# EAGLE board BlueDaq_V1.0 (EAGLE 7.6.0)
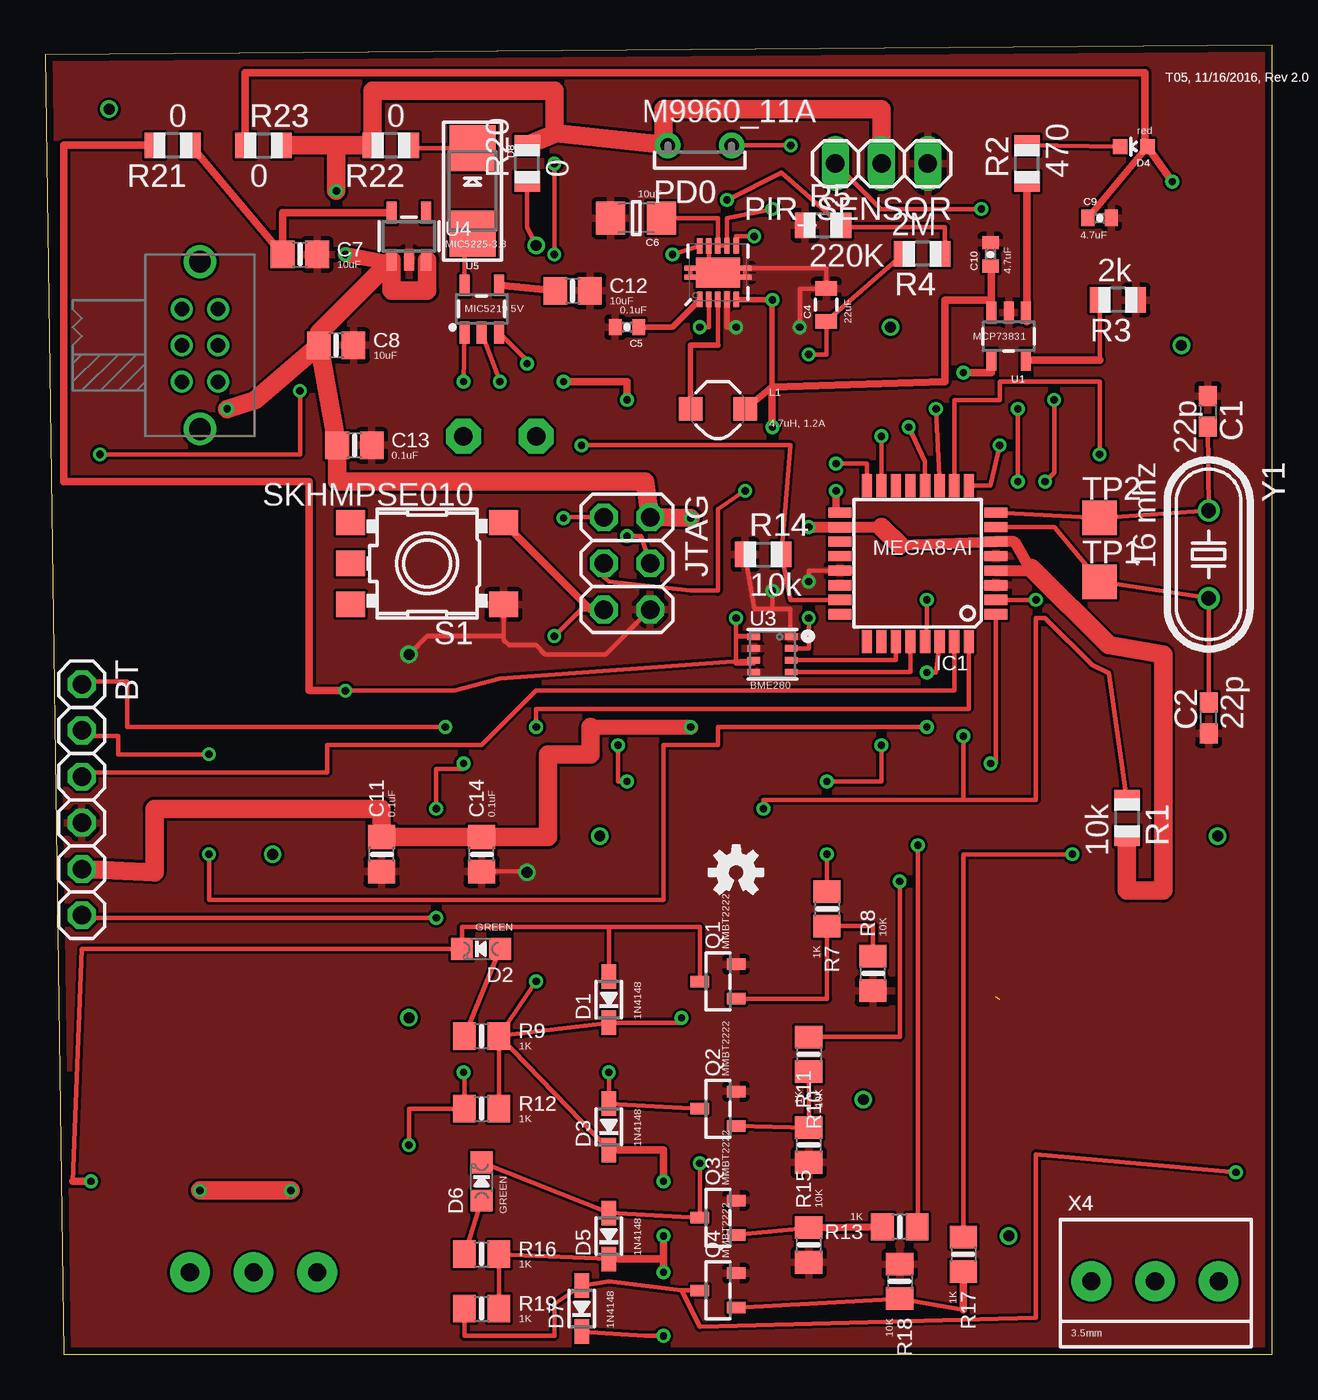
[diagram p0: board, top side]
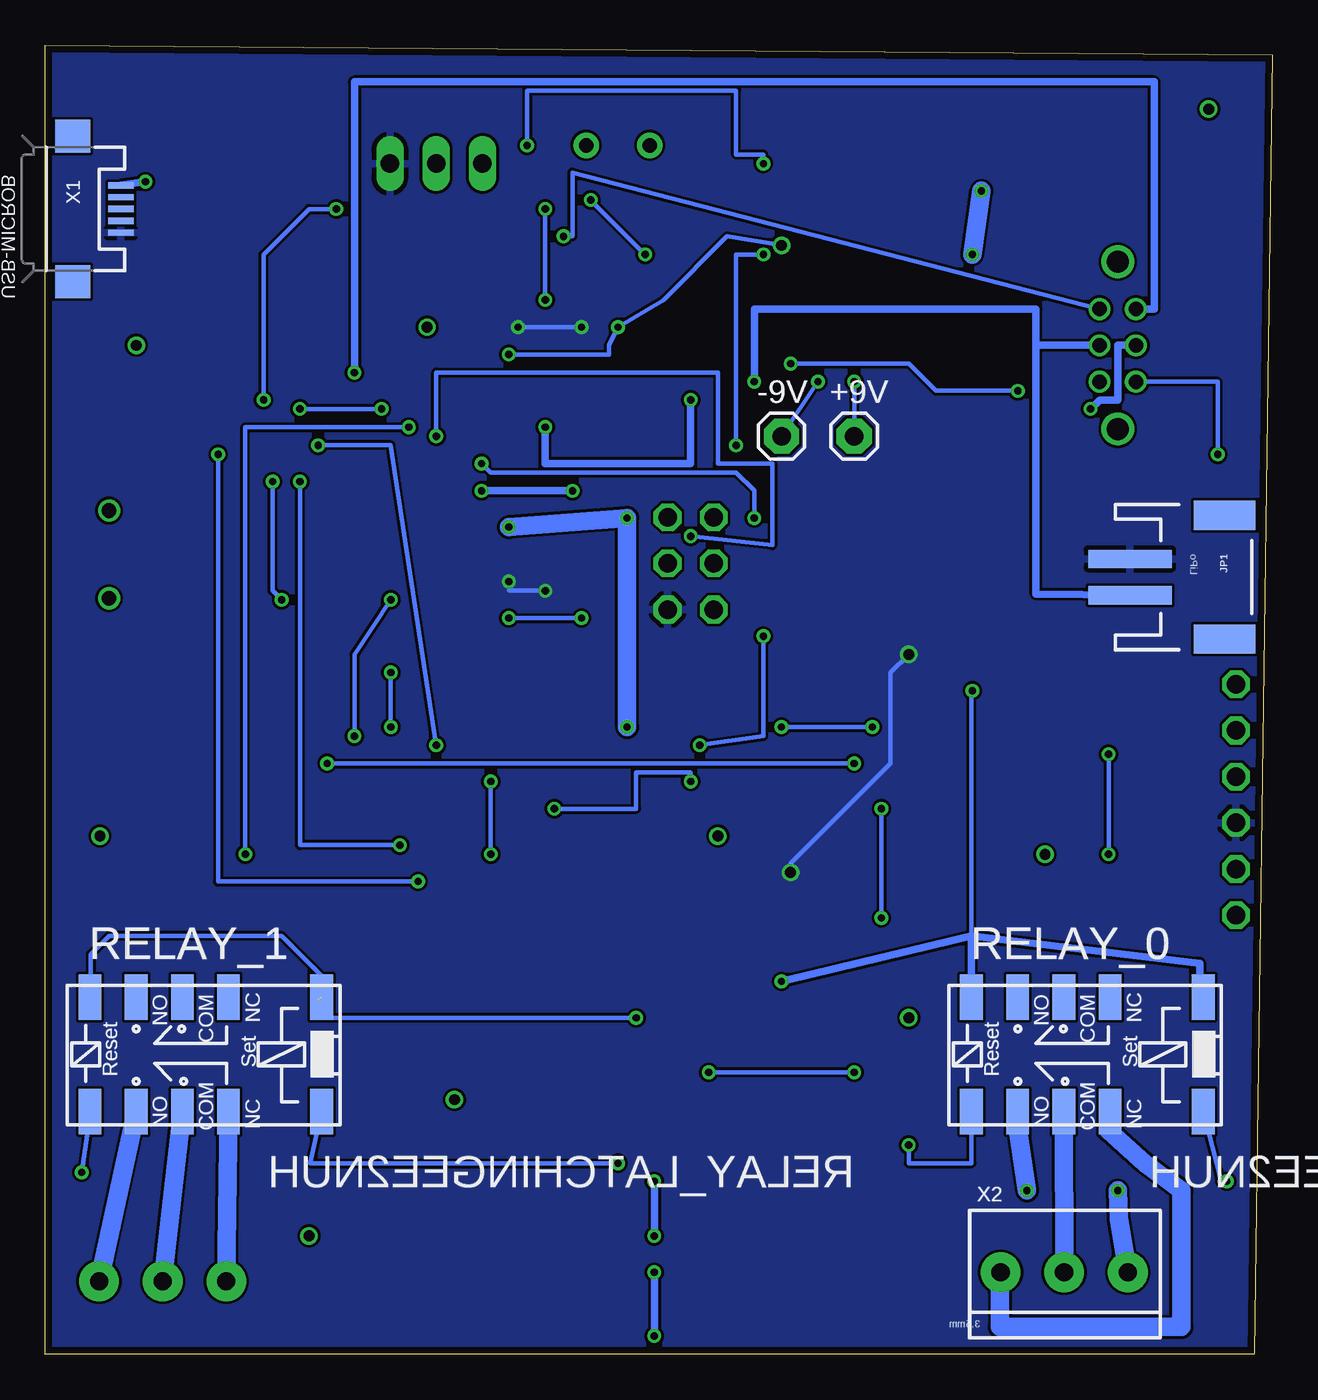
[diagram p1: board, bottom side, seen from below]

Size 67.5 x 72 mm. Coordinates in mm from the lower left corner, seen from the top.
Outline: 1,0 67.5,0 67.5,72 0,71.5 1,0
Copper layers (1*16): Top 0.0356mm / dielectric 1.5011mm / Bottom 0.0356mm
Design rules "OSH-Park-2-layer": minimum track width 6mil, minimum drill 13mil, track to track 6mil, track to pad 6mil, pad to pad 6mil, via to via 6mil, smd to smd 6mil, copper to edge 15mil, drill to drill 6mil, minimum pad ring 7mil, minimum via ring 7mil, stop-mask expansion 3mil, vias tented up to drill 0mil, thermal gap 10mil
Net classes: 1 HV: width 0.406 mm, drill 0.381 mm, clearance 1.016 mm

## Footprints (pad centres in the part's own frame; a part is rotated, then mirrored left to right if it is on the bottom)
1X01 = drill 1.016 pad 1.93 octagon: 1 0,0
1X06 = drill 1.016 octagon: 1 -6.35,0; 2 -3.81,0; 3 -1.27,0; 4 1.27,0; 5 3.81,0; 6 6.35,0
C0603 = smd 1.1 x 1: 1 -0.85,0; 2 0.85,0
0805 = smd 0.8 x 1.2: 1 -0.9,0; 2 0.9,0
0402-CAP = smd 0.7 x 0.9: 1 -0.65,0; 2 0.65,0
1206 = smd 1.6 x 1.8: 1 -1.4,0; 2 1.4,0
0805-NO@1 = smd 1.3 x 1.5: 1 -0.95,0; 2 0.95,0
SOD-323 = smd 1.35 x 0.8: A 1.27,0; C -1.27,0
CHIPLED_0805_NOOUTLINE = smd 1.2 x 1.2: A 0,-1.05; C 0,1.05
LED-0603 = smd 0.8 x 0.8: A 0,-0.75; C 0,0.75
SMADIODE = smd 2.54 x 2.54: A 2.349,0; C -2.349,0
TQFP32-08 = smd 1.27 x 0.559: 1 -4.293,2.8; 2 -4.293,2; 3 -4.293,1.2; 4 -4.293,0.4; 5 -4.293,-0.4; 6 -4.293,-1.2; 7 -4.293,-2; 8 -4.293,-2.8; 17 4.293,-2.8; 18 4.293,-2; 19 4.293,-1.2; 20 4.293,-0.4; 21 4.293,0.4; 22 4.293,1.2; 23 4.293,2; 24 4.293,2.8 | smd 0.559 x 1.27: 9 -2.8,-4.293; 10 -2,-4.293; 11 -1.2,-4.293; 12 -0.4,-4.293; 13 0.4,-4.293; 14 1.2,-4.293; 15 2,-4.293; 16 2.8,-4.293; 25 2.8,4.293; 26 2,4.293; 27 1.2,4.293; 28 0.4,4.293; 29 -0.4,4.293; 30 -1.2,4.293; 31 -2,4.293; 32 -2.8,4.293
JST-2-SMD = smd 1 x 4.6: 1 -1,-3.7; 2 1,-3.7 | smd 1.6 x 3.4: NC1 -3.4,1.5; NC2 3.4,1.5
2X03 = drill 1.016 octagon: 1 -2.54,-1.27; 2 -2.54,1.27; 3 0,-1.27; 4 0,1.27; 5 2.54,-1.27; 6 2.54,1.27
CDRH2D09 = smd 1.3 x 1.3: P$1 -1.5,0; P$2 1.5,0
M9960 = drill 0.8 pad 1.4: 1 -1.75,0; 2 1.75,0
1X03 = drill 1.016 long: 1 -2.54,0; 2 0,0; 3 2.54,0
SOT23-R = smd 0.635 x 1.016: 1 -0.95,-1; 2 0.95,-1; 3 0,1
R0805 = smd 1.1 x 1.4: 1 -1,0; 2 1,0
0805-NO = smd 1.24 x 1.5: 1 -0.95,0; 2 0.95,0
RELAY_EE2_LATCH = smd 1.25 x 2.5: 1 -6.2,-3.15; 3 -1.07,-3.15; 4 1.47,-3.15; 5 4.01,-3.15; 6 6.55,-3.15; 7 6.55,3.15; 8 4.01,3.15; 9 1.47,3.15; 10 -1.07,3.15; 12 -6.2,3.15
SKHMPXE010 = smd 1.6 x 1.4: 1 -4.2,2.25; 2 4.2,2.25; 3 -4.2,-2.25; 4 4.2,-2.25; 5 4.2,0
EG2211 = drill 0.8: P1 -1,0; P1-TA -1,2; P1-TB -1,-2; P2 1,0; P2-TA 1,2; P2-TB 1,-2 | drill 1.2: P$7 0,4.6; P$8 0,-4.6
TP19SQ = smd 1.9 x 1.9: TP 0,0
SOT23-5 = smd 0.55 x 1.2: 1 -0.95,-1.3; 2 0,-1.3; 3 0.95,-1.3; 4 0.95,1.3; 5 -0.95,1.3
QFN-10_PAD = smd 0.297 x 0.85: 1 -1,-1.475; 2 -0.5,-1.475; 3 0,-1.475; 4 0.5,-1.475; 5 1,-1.475; 6 1,1.475; 7 0.5,1.475; 8 0,1.475; 9 -0.5,1.475; 10 -1,1.475 | smd 0.7 x 0.28: 11 -1.5,0.25; 12 -1.5,-0.25; 13 1.5,0.25; 14 1.5,-0.25 | smd 2.4 x 1.65: 15 0,0
BME280 = smd 0.7 x 0.35: 1 1.025,0.975; 2 1.025,0.325; 3 1.025,-0.325; 4 1.025,-0.975; 5 -1.025,-0.975; 6 -1.025,-0.325; 7 -1.025,0.325; 8 -1.025,0.975
USB-MICROB = smd 0.35 x 1.4: D+ 0,2.65; D- -0.65,2.65; GND 1.3,2.65; ID 0.65,2.65; VBUS -1.3,2.65 | smd 1.8 x 1.9: MT1 -4,0; MT2 4,0
TERMBLOCK_1X3-3.5MM = drill 1 pad 2.184: 1 3.55,0; 2 0.05,0; 3 -3.45,0
HC49U-V = drill 0.813: 1 -2.413,0; 2 2.413,0

## Placement (x,y rotation side)
+9V  [1X01]  23,50.5 0 bottom
-9V  [1X01]  27,50.5 0 bottom
BT  [1X06]  2,30.5 270 top
C1  22p  [C0603]  63.96,51.87 270 top
C2  22p  [C0603]  64,35 90 top
C4  22uF  [0805]  42.96,57.73 90 top
C5  0.1uF  [0402-CAP]  32,56.5 180 top
C6  10uF  [1206]  32.5,62.5 180 top
C7  10uF  [0805-NO@1]  14,60.5 0 top
C8  10uF  [0805-NO@1]  16,55.5 0 top
C9  4.7uF  [0402-CAP]  58,62.5 0 top
C10  4.7uF  [0402-CAP]  52,60.5 90 top
C11  0.1uF  [0805-NO@1]  18.5,27.5 90 top
C12  10uF  [0805-NO@1]  29,58.5 0 top
C13  0.1uF  [0805-NO@1]  17,50 0 top
C14  0.1uF  [0805-NO@1]  24,27.5 90 top
D1  1N4148  [SOD-323]  31,19.5 90 top
D2  GREEN  [CHIPLED_0805_NOOUTLINE]  23.96,22.29 90 top
D3  1N4148  [SOD-323]  31,12.5 90 top
D4  red  [LED-0603]  59.88,66.43 90 top
D5  1N4148  [SOD-323]  31,6.5 90 top
D6  GREEN  [CHIPLED_0805_NOOUTLINE]  24,9.5 0 top
D7  1N4148  [SOD-323]  29.5,2.5 90 top
D8  [SMADIODE]  23.5,64 270 top
IC1  MEGA8-AI  [TQFP32-08]  48,43.5 180 top
JP1  LiPo  [JST-2-SMD]  4.13,42.75 270 bottom
JTAG  [2X03]  32,43.5 270 top
L1  4.7uH, 1.2A  [CDRH2D09]  37,52 0 top
PD0  M9960_11A  [M9960]  36,66.5 0 top
PIR_SENSOR  [1X03]  46,65.5 180 top
Q1  MMBT2222  [SOT23-R]  37,20.5 90 top
Q2  MMBT2222  [SOT23-R]  37,13.5 90 top
Q3  MMBT2222  [SOT23-R]  37,7.5 90 top
Q4  MMBT2222  [SOT23-R]  37,3.5 90 top
R1  10k  [R0805]  59.5,29.5 270 top
R2  470  [R0805]  54,65.5 90 top
R3  2k  [R0805]  59,58 180 top
R4  2M  [R0805]  48.24,60.54 180 top
R5  220K  [R0805]  42.79,62.11 0 top
R7  1K  [0805-NO]  43,24.5 270 top
R8  10K  [0805-NO]  45.53,20.94 90 top
R9  1K  [0805-NO]  24,17.5 0 top
R10  1K  [0805-NO]  42,16.5 270 top
R11  10K  [0805-NO]  42,11.5 90 top
R12  1K  [0805-NO]  24,13.5 0 top
R13  1K  [0805-NO]  47,7 180 top
R14  10k  [R0805]  39.5,44 0 top
R15  10K  [0805-NO]  42,6 90 top
R16  1K  [0805-NO]  24,5.5 0 top
R17  1K  [0805-NO]  50.5,5.5 270 top
R18  10K  [0805-NO]  47,4 270 top
R19  1K  [0805-NO]  24,2.5 0 top
R20  0  [R0805]  26.5,65.5 90 top
R21  0  [R0805]  7,66.5 180 top
R22  0  [R0805]  19,66.5 180 top
R23  0  [R0805]  12,66.5 0 top
RELAY_0  RELAY_LATCHINGEE2NUH  [RELAY_EE2_LATCH]  10,16.5 180 bottom
RELAY_1  RELAY_LATCHINGEE2NUH  [RELAY_EE2_LATCH]  58.5,16.5 180 bottom
S1  SKHMPSE010  [SKHMPXE010]  21,43.5 180 top
S2  [EG2211]  8.5,55.5 0 top
TP1  TPTP19SQ  [TP19SQ]  58,42.5 0 top
TP2  TPTP19SQ  [TP19SQ]  58,46 0 top
U1  MCP73831  [SOT23-5]  53,56 180 top
U2  TPS61200  [QFN-10_PAD]  37,59.5 0 top
U3  BME280  [BME280]  40,38.5 0 top
U4  MIC5225-3.3  [SOT23-5]  20,61.5 0 top
U5  MIC5219 5V  [SOT23-5]  24,57.5 0 top
U$22  OSHW-LOGOS  [OSHW-LOGO-S]  38,26.5 0 top
X1  USB-MICROB  [USB-MICROB]  66,63 270 bottom
X2  3.5mm  [TERMBLOCK_1X3-3.5MM]  11.5,4.5 0 bottom
X4  3.5mm  [TERMBLOCK_1X3-3.5MM]  61,4 0 top
Y1  16 mhz  [HC49U-V]  64,44 270 top

## Library data of the parts
+9V -9V BT D8 R1-R5 R14 R20-R23 = adafruit
C1 C2 = rcl
C4 C6 = CH_passive
C5 C9 C10 D4 JP1 L1 U1 U2 U$22 X1 = SparkFun
C7 C8 C11-C14 D1-D3 D5-D7 Q1-Q4 R7-R13 R15-R19 RELAY_0 RELAY_1 U3 U4 X2 X4 = microbuilder
IC1 = atmel; MPN: ATMEGA8-16AU; OC_FARNELL: 9171371; OC_NEWARK: 73M8863
JTAG PIR_SENSOR = pinhead
PD0 = photo-elements
S1 = switch
S2 = SparkFun-Electromechanical
TP1 TP2 = testpad
U5 = SparkFun-PowerIC; PROD_ID: VREG-10107
Y1 = SparkFun-FreqCtrl

## Nets
3.3V: D1.C D3.C D5.C D7.C R9.2 R12.2 R16.2 R19.2 R21.2 RELAY_0.1 RELAY_0.6 RELAY_1.1 RELAY_1.6 U3.2 U3.6 U3.8
BT_BRK: BT.1 IC1.32
BT_RX: BT.2 IC1.30
BT_STS: BT.6 IC1.1
BT_TX: BT.3 IC1.31
COM1 [HV]: RELAY_0.9 X2.2
COM2 [HV]: RELAY_1.9 X4.2
EN_5V: S2.P1-TB U5.3
EN_BC: S2.P2-TA U2.6
FB: R4.1 R5.2 U2.10
GND: BT.4 C1.1 C2.1 C4.2 C5.2 C6.2 C7.2 C8.2 C9.2 C10.2 C11.1 C12.2 C13.2 C14.1 IC1.3 IC1.5 IC1.21 JP1.1 JTAG.6 PIR_SENSOR.1 Q1.2 Q2.2 Q3.2 Q4.2 R3.1 R5.1 R8.1 R11.1 R14.1 R15.1 R18.1 S1.1 U1.2 U2.4 U2.13 U2.14 U3.1 U3.5 U3.7 U4.2 X1.GND
N$1: IC1.23 PD0.2 R14.2
N$2: L1.P$1 U2.3
N$3: C5.1 U2.1
N$4: D4.C R2.2
N$5: D8.A U5.5
N$6: D1.A D2.C Q1.3 RELAY_0.12
N$7: D5.A D6.C Q3.3 RELAY_1.12
N$8: Q3.1 R13.2 R15.2
N$9: D6.A R16.1
N$10 [HV]: RELAY_1.10 X4.3
N$11: R3.2 U1.5
N$12: D7.A Q4.3 R19.1 RELAY_1.7
N$13: Q4.1 R17.2 R18.2
N$14: R2.1 U1.1
N$15: +9V.1 U5.1
N$16: -9V.1 U5.2
N$17: C12.1 U5.4
N$18: D8.C R22.1
N$20: C4.1 R4.2 R20.1 U2.2
N$22: Q1.1 R7.2 R8.2
N$23: C9.1 D4.A R23.1 X1.VBUS
N$25: D3.A Q2.3 R12.1 RELAY_0.7
N$26: D2.A R9.1
N$27: Q2.1 R10.2 R11.2
N$28 [HV]: RELAY_0.10 X2.3
NO1 [HV]: RELAY_0.8 X2.1
NO2 [HV]: RELAY_1.8 X4.1
OUT: C7.1 R21.1 U4.5
PGND: U2.9 U2.11 U2.12 U2.15
PIR0: IC1.2 PIR_SENSOR.3
R0_RSET: IC1.10 R10.1
R0_SET: IC1.9 R7.1
R1_RSET: IC1.12 R17.1
R1_SET: IC1.11 R13.1
RESET_PIN: IC1.29 JTAG.5 R1.1 S1.3
SCL: IC1.28 U3.4
SDA: IC1.27 U3.3
SPI_MISO: IC1.16 JTAG.1
SPI_MOSI: IC1.15 JTAG.4
SPI_SCK: IC1.17 JTAG.3
V_CHRG: S2.P1-TA U1.4
VBATT: C6.1 C10.1 JP1.2 L1.P$2 S2.P2 U1.3 U2.5 U2.7 U2.8
VCC: BT.5 C8.1 C11.2 C13.1 C14.2 IC1.4 IC1.6 IC1.18 JTAG.2 PD0.1 PIR_SENSOR.2 R1.2 R20.2 R22.2 R23.2 S2.P1 U4.1 U4.3
XTAL1: C2.2 IC1.7 TP1.TP Y1.2
XTAL2: C1.2 IC1.8 TP2.TP Y1.1

## Tracks (layer width: path | path; a pad name or v marks a point on that pad's centre or on a via)
3.3V  (via drill 0.4)  (1 unrouted)
  Top 0.254: R9.2 D1.C 35,18.23 v35,18.5 | R9.2 R12.2 | R9.2 D3.C | R9.2 v27,20.5 | D5.C R16.2 R19.2 | v34,1 33,1 D7.C | v16.5,36.5 22.5,36.5 25,37.17 U3.6 38.98,38 38,38 38,39.48 U3.8 38.98,39.5 38,39.5 v38,40.5 | U3.2 42,38.83 v42,40.5
  Top 0.406: D5.C 34,5.23 v34,4.5 v34,6.5 | D3.C 34,11.23 v34,9.5 | R21.2 1,66.5 1,48 14.5,48 14.5,36.5 v16.5,36.5
  Bottom 0.254: 16.55,23 16.55,36.5 v16.5,36.5 | v42,40.5 v38,40.5 | v35,18.5 52.5,18.5 52.5,19.5 | RELAY_1.1 52.3,20.8 54.5,23 64,23 65,22 65,19.7 RELAY_1.6 | 4,19.85 RELAY_0.1
  Bottom 0.406: RELAY_0.6 16.55,23 | 16.55,23 4,21.5 4,19.85 | v27,20.5 16.55,23 | v34,4.5 v34,1 | v34,9.5 v34,6.5
BT_BRK  (via drill 0.4)
  Top 0.254: IC1.32 50.8,35.5 27,35.5 v27,34.5 | v22,34.5 4.5,34.5 4.5,37 2,37 BT.1
  Bottom 0.254: v27,34.5 v22,34.5
BT_RX  (via drill 0.4)
  Top 0.254: IC1.30 49,37.5 v48.5,37.5 | v48.5,34.5 37,34.5 37,33.5 34,33.5 34,25 9,25 v9,27.5 | v9,33 4,33 4,34 2,34 BT.2
  Bottom 0.254: v48.5,37.5 v48.5,34.5 | v9,27.5 v9,33
BT_STS  (via drill 0.4)
  Top 0.254: IC1.1 52.29,32.5 v52,32.5 | v23,32.5 23,32.18 21.5,32.18 v21.5,30 | v21.5,24 2,24
  Top 0.406: 2,24 BT.6
  Bottom 0.254: v52,32.5 v23,32.5 | v21.5,30 v21.5,24
BT_TX
  Top 0.254: IC1.31 50,36.5 27,36.5 24,33.5 15.5,33.5 15.5,32 2,32 BT.3
COM1
  Bottom 1.016: X2.2 RELAY_0.9
COM2
  Bottom 1.016: X4.2 RELAY_1.9
EN_5V  (via drill 0.4)
  Top 0.254: U5.3 26.5,54.65 v26.5,54.5 | v14,53 14,49.5 v3,49.5
  Bottom 0.254: v26.5,54.5 20,54.5 18.5,53 v14,53 | v3,49.5 3,53.5 S2.P1-TB
EN_BC  (via drill 0.4)
  Top 0.254: U2.6 38,61.5 v39,61.5
  Bottom 0.254: v39,61.5 38.5,61.5 38.5,65 S2.P2-TA
FB  (via drill 0.4)
  Top 0.254: R4.1 49.5,60.5 49.5,62 43.79,62 R5.2 40.5,65 v37.5,63.5 | v34.5,60.5 U2.10
  Bottom 0.254: v37.5,63.5 v34.5,60.5
GND  (via drill 0.4, 0.6)
  Top 0.254: R14.1 39,41 40,41 | 40,41 41,41 41,39.48 U3.1 | IC1.21 42,43.1 v42,42.5 | v40,42 40,41 | U2.14 U2.13 42.96,59.75 C4.2 41.5,58.63 v41.5,56.5 | S1.1 25.2,39.5 | 25.2,39.5 25.2,39.3 25.5,39 27,39 27.5,38.5 30.81,38.5 JTAG.6 | C14.1 26.5,26.55 v26.5,26.5 | v20,38.5 21,39.5 25.2,39.5
  Top 0.305: U2.4 37.5,56.5 v38,56.5
  Bottom 0.254: v42,42.5 42,42 v40,42 | v38,56.5 v41.5,56.5 | v26.5,26.5 26.5,27 21,32.5 21,37.5 v20,38.5
  pour Top: 0.5,71 67,71.5 67.5,0.5 1.5,0
  pour Bottom: 0.5,71 67,71.5 67.5,0.5 1.5,0
N$1  (via drill 0.4)
  Top 0.254: IC1.23 41,41.5 R14.2 41,50 v29.5,50 | v41,66.5 PD0.2 | v28,60.5 v28,65.5
  Bottom 0.254: v41,66.5 41,69.5 29.5,69.5 29.5,66 28,66 v28,65.5 | v29.5,50 29.5,60.5 v28,60.5
N$2
  Top 0.254: U2.3 37,55.5
  Top 0.305: 37,55.5 35.5,55.5 L1.P$1
N$3
  Top 0.305: C5.1 34.5,56.5 U2.1
N$4
  Top 0.254: D4.C R2.2
N$5
  Top 0.254: D8.A 23.05,61.65 U5.5
N$6  (via drill 0.4)
  Top 0.254: 31,23.5 22.91,23.5 D2.C 2,22.29 1.5,9.5 | 31,23.5 D1.A | 31,23.5 36,23.5 Q1.3
  Top 0.406: 1.5,9.5 v2.5,9.5
  Bottom 0.254: 2.8,9.5 RELAY_0.12
  Bottom 0.406: v2.5,9.5 2.8,9.5
N$7  (via drill 0.4)
  Top 0.254: D6.C D5.A 35.48,7.53 Q3.3 v36,10.5
  Bottom 0.254: RELAY_1.12 52.95,10.5 v36,10.5
N$8
  Top 0.254: Q3.1 R15.2
  Top 0.406: R15.2 R13.2
N$9
  Top 0.254: D6.A R16.1
N$10
  Bottom 1.016: X4.3 RELAY_1.10
N$11
  Top 0.254: R3.2 58,54.7
  Top 0.406: 58,54.7 U1.5
N$12  (via drill 0.4)
  Top 0.254: R19.1 23.05,1 28,1 28,2.77 D7.A 31,4 35,3.5 | 35,3.5 Q4.3 | v65.5,10 54.5,11 54.5,2 36,1.5 35,3.5
  Bottom 0.254: RELAY_1.7 65,13.35 v65.5,10
N$13
  Top 0.254: Q4.1 R18.2 50.5,2.45
  Top 0.406: 50.5,2.45 R17.2
N$14
  Top 0.406: U1.1 54,56.8 R2.1
N$15  (via drill 0.4)
  Top 0.254: v23,53.5 U5.1
  Bottom 0.254: +9V.1 v23,53.5
N$16  (via drill 0.4)
  Top 0.254: v25,53.5 U5.2
  Bottom 0.254: -9V.1 v25,53.5
N$17
  Top 0.406: U5.4 C12.1
N$18
  Top 0.254: D8.C 20,66.35 R22.1
N$19  (via drill 0.6)
  other vias: 3.5,68.5
N$20  (via drill 0.4, 0.6)
  Top 0.254: R4.2 C4.1 42.96,55 v42,55 | U2.2 36.5,56.5 v36,56.5 | R20.1 26.5,62 v27,61
  Bottom 0.254: v42,55 36.5,55 36.5,55.5 v36,56.5 33.5,58 30,61.5 v27,61
N$21  (via drill 0.6)
  other vias: 62.5,55.5
N$22
  Top 0.254: Q1.1 43,19.55 R7.2 45.53,23.55 R8.2
N$23  (via drill 0.4)
  Top 0.406: D4.A v62,64.5 | C9.1 D4.A | R23.1 11,70.5 60.5,70.5 60.5,66.43 D4.A
  Bottom 0.406: v62,64.5 X1.VBUS
N$24  (via drill 0.6)
  other vias: 12.5,27.5
N$25  (via drill 0.4)
  Top 0.254: v20,11.5 20,13.5 R12.1 23.05,15.5 v23,15.5 | Q2.3 D3.A v31,15.5
  Bottom 0.254: v20,11.5 20,10.5 16.55,10.5 RELAY_0.7 | v23,15.5 v31,15.5
N$26
  Top 0.254: D2.A R9.1
N$27
  Top 0.254: Q2.1 R11.2 R10.2
N$28
  Bottom 1.016: X2.3 15,3.5 15,1.5 5,1.5 5,9 7,10.5 9,12.28 RELAY_0.10
N$29  (via drill 0.6)
  other vias: 45,14
N$30  (via drill 0.6)
  other vias: 53,6.5
N$31  (via drill 0.6)
  other vias: 20,18.5
N$32  (via drill 0.6)
  other vias: 46.5,56.5
N$33  (via drill 0.6)
  other vias: 64.5,28.5
N$34  (via drill 0.6)
  other vias: 30.5,28.5
NO1  (via drill 0.4)
  Top 1.016: v8.5,9 v13.5,9
  Bottom 1.016: RELAY_0.8 14,12.34 v13.5,9 | X2.1 8.45,7.45 v8.5,9
NO2
  Bottom 1.016: X4.1 RELAY_1.8
OUT
  Top 0.406: R21.1 C7.1 13.05,62.8 U4.5
PGND
  Top 0.254: 37.5,59 U2.15 36.5,60 | 36.5,60 U2.9 | U2.12 U2.11 36.25,59.75 36.5,60
PIR0  (via drill 0.4)
  Top 0.254: IC1.2 v54.5,41.5 | v55,48 55.5,48.5 v55.5,52.5 | v51.5,63 45.96,63 PIR_SENSOR.3
  Bottom 0.254: v54.5,41.5 55,42 v55,48 | v55.5,52.5 55.5,60.5 53,63 v51.5,63
R0_RSET  (via drill 0.4)
  Top 0.254: IC1.10 50,52.5 52.5,52.5 52.5,53.5 58,53.5 v58,49.5 | v47,26 47,17.45 R10.1
  Bottom 0.254: v58,49.5 58,26 v47,26
R0_SET  (via drill 0.4)
  Top 0.254: R7.1 v43,27.5 | v43,31.5 46,31.5 v46,33.5 | v52.5,50 52,47.79 IC1.9
  Bottom 0.254: v43,27.5 v43,31.5 | v46,33.5 48.5,50 v52.5,50
R1_RSET  (via drill 0.4)
  Top 0.254: v47.5,51 48.4,49.1 IC1.12 | v56.5,27.5 50.5,27.5 R17.1
  Bottom 0.254: v56.5,27.5 56.5,51 v47.5,51
R1_SET  (via drill 0.4)
  Top 0.254: v49,52 IC1.11 | v53.5,48 v53.5,52 | R13.1 48,6.5 v48,28
  Bottom 0.254: v48,28 53.5,28 v53.5,48 | v49,52 v53.5,52
RESET_PIN  (via drill 0.4)
  Top 0.254: R1.1 58.5,37.46 57.59,37.91 55,40.5 54.5,40.5 54.5,30.5 50.5,30.5 | 50.5,30.5 39.5,30.5 v39.5,30 | v32,31.5 31.5,31.5 v31.5,33.5 | v28,39.5 29.46,40.96 JTAG.5 | IC1.29 48.5,40.11 v48.5,41.5 | v50.5,34 50.5,30.5
  Top 0.406: JTAG.5 29.99,40.96 S1.3
  Bottom 0.254: v39.5,30 35,30 35,32 32,32 v32,31.5 | v31.5,33.5 28,34 v28,39.5 | v48.5,41.5 50.5,38.5 v50.5,34
SCL
  Top 0.254: U3.4 47.6,37.52 IC1.28
SDA
  Top 0.254: U3.3 46.8,38.17 IC1.27
SPI_MISO  (via drill 0.4)
  Top 0.254: IC1.16 45.2,49 v43.5,49 | v28.5,46 28.54,46.04 JTAG.1
  Bottom 0.254: v43.5,49 43,48.5 29.5,48.5 28.5,47.5 v28.5,46
SPI_MOSI  (via drill 0.4)
  Top 0.254: IC1.15 v46,50.5 | v32,45 32.77,45 JTAG.4
  Bottom 0.254: v46,50.5 46,54 30.5,54 30.5,49 27.5,49 27.5,44.5 v32,45
SPI_SCK  (via drill 0.4)
  Top 0.254: v38.5,47.5 37,46.5 37,42 35.5,42 31,42.5 30.73,42.73 JTAG.3
  Top 0.406: IC1.17 43.5,46.51 v43.5,47.5
  Bottom 0.406: v43.5,47.5 v38.5,47.5
V_CHRG  (via drill 0.4)
  Top 0.406: v50.5,54 52.05,54 U1.4
  Bottom 0.406: S2.P1-TA 6.5,57.5 6.5,70 50.5,70 v50.5,54
VBATT  (via drill 0.4)
  Top 0.254: 52.05,59.85 C10.1 | U2.5 38,58 | C6.1 37,62.5 U2.8 U2.7 37.5,62.5 v40,63 | v40,58 40,58.02 39,58.02
  Top 0.305: U2.5 39,58.02 39.97,58.02 39.97,52.5
  Top 0.406: U1.3 52.05,58 | 52.05,58 52.05,59.85 | L1.P$2 39.97,53.2 | 39.97,53.2 49.5,53.5 49.5,58 52.05,58 | v28.5,53.5 32,53.5 v32,52.5 | v40,51 39.97,51 39.97,52.5 39.97,53.2
  Bottom 0.254: v40,63 v40,58
  Bottom 0.406: JP1.2 13,41.83 13,55.5 | 13,55.5 S2.P2 | 13,55.5 13,57.5 28.5,57.5 v28.5,53.5 | v32,52.5 32,49 40,49 v40,51
VCC  (via drill 0.4)
  Top 0.254: 28,67.17 28.11,67.17 | 34,66.5 PD0.1 | 54.25,43.1 54.25,43.25
  Top 0.406: C8.1 15.05,56.2 | 21,60.2 U4.3 | U4.1 19.05,60
  Top 0.61: 54.25,43.25 54,43.5 53.3,44.7 IC1.6 47,44.5 | v42,45.5 IC1.18 46,45.5 | IC1.4 54.25,43.1
  Top 0.813: 30,34.5 v35.5,34.5 | 19.05,60 v16.5,60.5
  Top 1.016: PD0.1 28.11,67.17 R20.2 | 28,67.17 28,69.5 18,69.5 R22.2 16,66.5 | 16,66.5 R23.2 | PIR_SENSOR.2 46,68.5 34,68.5 34,66.5 | 54.25,43.25 58.5,39 61.5,38.5 61.5,25.5 59.5,25.5 R1.2 | 30,34.5 30,33 27.66,33 27.66,28.45 C14.2 C11.2 18.5,30 6,30 6,26.5 BT.5 | v10,52 11.55,52.5 C8.1 C13.1 16.05,48 33,48 JTAG.2 v35.5,46 | 15.05,56.2 U4.1 19.05,58.5 21,58.5 21,60.2 | v16,64 16,66.5 | 46,45.5 47,44.5
  Bottom 0.406: S2.P1 8.5,55.5 8.5,52.5 9.5,52.5 v10,52
  Bottom 1.016: v16.5,60.5 v16,64 | v35.5,34.5 v35.5,46 v42,45.5
XTAL1
  Top 0.254: C2.2 Y1.2 TP1.TP 55.5,45.5 IC1.7
XTAL2
  Top 0.254: C1.2 Y1.1 TP2.TP IC1.8

## Text on the board
tNames: T05, 11/16/2016, Rev 2.0
_tsilk: T05, 11/16/2016, Rev 2.0 | 0 | 0 | R23 | M9960_11A | red | D8 | D4 | R21 | R22 | R20 | 0 | R2 | 470 | 0 | 10uF | PIR_SENSOR | PD0 | R5 | 2M | C9 | U4 | MIC5225-3.3 | C6 | 4.7uF | 10uF | C7 | U5 | 220K | R4 | C10 | 2k | 4.7uF | 10uF | C12 | 0.1uF | MIC5219 5V | C4 | 22uF | R3 | C5 | MCP73831 | 10uF | C8 | U1 | L1 | 22p | C1 | 4.7uH, 1.2A | C13 | 0.1uF | 16 mhz | Y1 | SKHMPSE010 | JTAG | TP2 | R14 | MEGA8-AI | TPTP19SQ | TP1 | 10k | TPTP19SQ | S1 | U3 | BT | IC1 | BME280 | C2 | 22p | C11 | 0.1uF | C14 | 0.1uF | 10k | R1 | GREEN | R8 | 10K | Q1 | MMBT2222 | 1K | R7 | D2 | D1 | 1N4148 | 1K | R9 | Q2 | MMBT2222 | 1K | R10 | R11 | 10K | 1K | R12 | D3 | 1N4148 | Q3 | MMBT2222 | D6 | GREEN | R15 | 10K | 1K | X4 | R13 | 1K | R16 | D5 | 1N4148 | Q4 | MMBT2222 | 1K | R17 | 1K | R19 | 10K | R18 | D7 | 1N4148 | 3.5mm
_bsilk: X1 | USB-MICROB | +9V | -9V | JP1 | LiPo | RELAY_0 | RELAY_1 | NC | COM | NO | NC | COM | NO | Set | Reset | Set | Reset | COM | COM | NC | NO | NC | NO | RELAY_LATCHINGEE2NUH | RELAY_LATCHINGEE2NUH | X2 | 3.5mm